# Altium PCB DSP6748_F.PcbDoc (part 6 of 16)
Units mil, origin at the board's own origin, x right, y up, seen from the top; angles counter-clockwise.
Board outline 8188.98 x 4055.12 mil, 4 copper layers (Top Layer, GND, VCC, Bottom Layer); 409 components, 262 nets, 1424 pads, 350 vias.
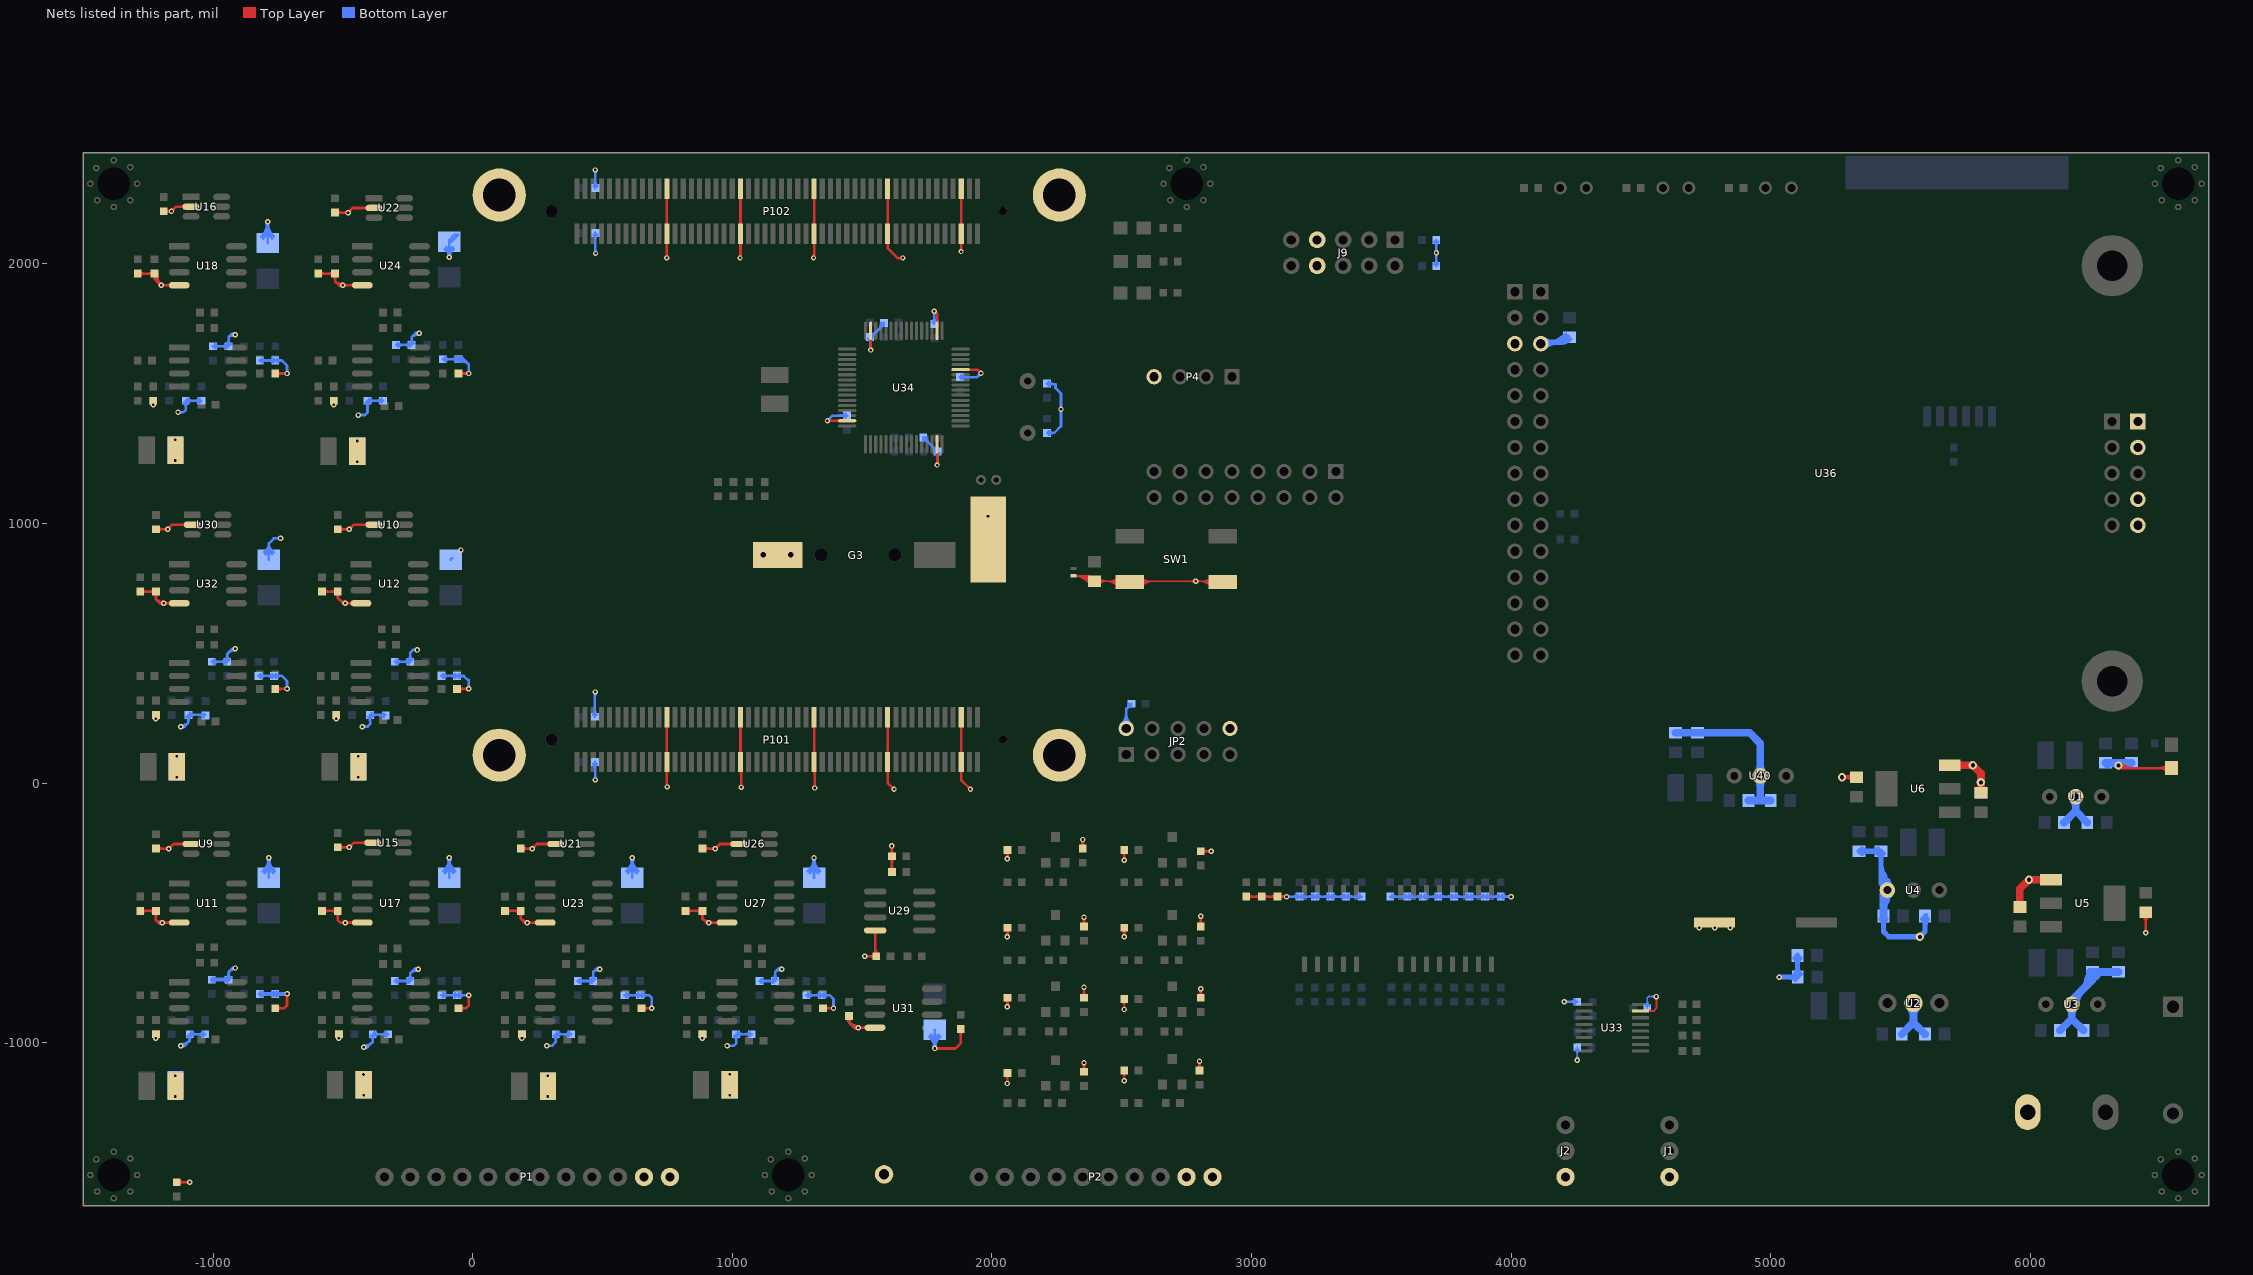
[diagram p8: the nets of this part, all layers, seen from the top]

## Via types
v1: diameter 21, hole 10, Top Layer to Bottom Layer, 244 vias
v2: diameter 20, hole 10, Top Layer to Bottom Layer, 84 vias
v3: diameter 32, hole 16, Top Layer to Bottom Layer, 11 vias
v4: diameter 24, hole 12, Top Layer to Bottom Layer, 7 vias
v5: diameter 39.37, hole 19.68, Top Layer to Bottom Layer, 3 vias
v6: diameter 30, hole 15, Top Layer to Bottom Layer, 1 vias

## Nets (pads, with @x,y where several pads share a name; then routed paths per layer and width w, separated by ;. In a path a pad name is that pad's centre, name@x,y a point inside that pad or via, vN(x,y) a via of type N, cw(c..) or ccw(c..) an arc to the next point about the centre after c; other vN are vias at no path point) (continued)
GND: (continued)
  Bottom Layer w10: v1(-1135.19,1427.52) -1115.19,1427.52 -1105.19,1437.52 C72.1@-1105.19,1472.52 C73.1@-1045.19,1472.52 ; v1@-1131.3,1423.63 cw(c-1121.91,1414.24) -1121.91,1427.52 cw(c-1121.91,1440.8) v1@-1131.3,1431.41 ; v1@-1125.87,213.07 ccw(c-1122.93,232.32) -1109.16,218.55 ; v1@-1125.19,-1016.98 ccw(c-1125.19,-991.63) -1107.27,-1009.56 ; v1(-1125.19,-1012.48) -1110.19,-1012.48 -1090.19,-992.48 ; v1@-1125.19,-1006.98 ccw(c-1125.19,-957.49) -1090.19,-992.48 ; v1(-1125.19,217.52) -1110.19,217.52 -1095.19,232.52 ; v1@-1124.36,222.96 ccw(c-1119.22,256.55) -1095.19,232.52 ; v1@-1121.3,-1016.37 cw(c-1111.91,-1025.76) -1111.91,-1012.48 cw(c-1111.91,-999.2) v1@-1121.3,-1008.59 ; v1@-1121.3,213.63 cw(c-1111.91,204.24) -1111.91,217.52 cw(c-1111.91,230.8) v1@-1121.3,221.41 ; C142.1@-1031.19,262.52 C141.1@-1095.19,262.52 -1095.19,232.52 ; C32.1@-1030.19,-967.48 C33.1@-1090.19,-967.48 -1090.19,-992.48 ; C144.1@-1005.19,467.52 C143.1@-945.19,467.52 -945.19,497.52 -925.19,517.52 v1(-915.19,517.52) ; C74.1@-1000.19,1682.52 C75.1@-940.19,1682.52 -940.19,1717.52 ; -941.65,501.06 cw(c-915.19,474.6) v1@-915.19,512.02 ; C35.1@-940.19,-757.48 -940.19,-727.48 ; -929.33,1728.38 cw(c-918.89,1717.95) v1@-913.57,1731.72 ; v1@-919.08,1723.63 ccw(c-928.47,1714.24) -928.47,1727.52 ccw(c-928.47,1740.8) v1@-919.08,1731.41 ; v1@-917.17,1722.39 ccw(c-924.94,1702.27) -940.19,1717.52 ; v1@-915.47,-717.97 ccw(c-917.14,-750.53) -940.19,-727.48 ; v1(-915.19,-712.48) -925.19,-712.48 -940.19,-727.48 ; v1(-915.19,1727.52) -930.19,1727.52 -940.19,1717.52 ; C146.1@-825.19,412.52 C145.1@-765.19,412.52 -735.19,412.52 -715.19,392.52 v1(-715.19,362.52) ; C77.1@-820.19,1627.52 C76.1@-760.19,1627.52 -735.19,1627.52 -715.19,1607.52 v1(-715.19,1577.52) ; C85.2@-790.19,2080.31 v1(-790.19,2162.52) ; C52.2@-785.19,-364.69 v1(-785.19,-287.48) ; C156.2@-785.19,860.31 -785.19,922.52 ; v1@-744.08,938.63 ccw(c-753.47,929.24) -753.47,942.52 ccw(c-753.47,955.8) v1@-744.08,946.41 ; v1(-740.19,942.52) -765.19,942.52 -785.19,922.52 ; v1@-719.08,366.41 ccw(c-728.47,375.8) -715.19,375.8 ccw(c-701.91,375.8) v1@-711.3,366.41 ; v1@-719.08,1581.41 ccw(c-728.47,1590.8) -715.19,1590.8 ccw(c-701.91,1590.8) v1@-711.3,1581.41 ; v1(-440.19,1417.52) -415.19,1417.52 -405.19,1427.52 C103.1@-405.19,1472.52 C104.2@-345.19,1472.52 ; v1@-436.3,1413.63 cw(c-426.91,1404.24) -426.91,1417.52 cw(c-426.91,1430.8) v1@-436.3,1421.41 ; v1(-425.19,217.52) -405.19,217.52 -395.19,227.52 C40.1@-395.19,262.52 C41.1@-337.19,262.52 ; v1@-421.3,213.63 cw(c-411.91,204.24) -411.91,217.52 cw(c-411.91,230.8) v1@-421.3,221.41 ; v1@-420.19,-1021.98 ccw(c-420.19,-996.63) -402.27,-1014.56 ; v1(-420.19,-1017.48) -405.19,-1017.48 -385.19,-997.48 ; v1@-420.19,-1011.98 ccw(c-420.19,-962.49) -385.19,-997.48 ; v1@-416.3,-1021.37 cw(c-406.91,-1030.76) -406.91,-1017.48 cw(c-406.91,-1004.2) v1@-416.3,-1013.59 ; C65.1@-325.19,-967.48 C64.1@-385.19,-967.48 -385.19,-997.48 ; C67.1@-300.19,-762.48 C66.1@-240.19,-762.48 -240.19,-732.48 ; C42.1@-300.19,467.52 C43.1@-240.19,467.52 -240.19,502.52 -230.19,512.52 v1(-214.16,512.52) ; C105.1@-295.19,1687.52 C106.1@-235.19,1687.52 -235.19,1717.52 ; -226.22,-718.51 cw(c-212.45,-732.28) v1@-209.51,-713.03 ; -221.22,1731.49 cw(c-207.45,1717.72) v1@-204.51,1736.97 ; v1@-218.05,508.63 ccw(c-227.44,499.24) -227.44,512.52 ccw(c-227.44,525.8) v1@-218.05,516.41 ; v1@-214.08,-721.37 ccw(c-223.47,-730.76) -223.47,-717.48 ccw(c-223.47,-704.2) v1@-214.08,-713.59 ; v1@-211.02,-722.92 ccw(c-216.16,-756.51) -240.19,-732.48 ; v1(-210.19,-717.48) -225.19,-717.48 -240.19,-732.48 ; v1@-209.08,1728.63 ccw(c-218.47,1719.24) -218.47,1732.52 ccw(c-218.47,1745.8) v1@-209.08,1736.41 ; v1@-206.02,1727.08 ccw(c-211.16,1693.49) -235.19,1717.52 ; v1(-205.19,1732.52) -220.19,1732.52 -235.19,1717.52 ; C68.1@-120.19,-817.48 C69.1@-60.19,-817.48 v1(-15.19,-817.48) ; C44.1@-120.19,412.52 C45.1@-60.19,412.52 -35.19,412.52 -15.19,392.52 ; C108.1@-115.19,1632.52 C107.1@-55.19,1632.52 ; C117.2@-107.57,2055.66 cw(c-125.54,2025) v1(-90,2025) ; C117.2@-102.51,2064.29 cw(c-115.31,2042.45) -90,2042.45 ; v1@-94.76,2027.75 ccw(c-106.26,2034.39) -93.44,2037.83 ccw(c-80.61,2041.26) v1@-87.25,2029.76 ; v1@-93.89,2028.89 ccw(c-103.28,2038.28) -90,2038.28 ccw(c-76.72,2038.28) v1@-86.11,2028.89 ; v1@-92.75,2029.76 ccw(c-99.39,2041.26) -86.56,2037.82 ccw(c-73.74,2034.39) v1@-85.24,2027.75 ; C84.2@-90.19,-364.69 v1(-90.19,-287.48) ; -90,2042.65 cw(c-64.64,2042.65) C117.2@-77.67,2064.41 ; C117.2@-90,2085.12 v1(-90,2025) ; C53.2@-85.19,860.31 -79.28,866.23 C53.2@-78.9,866.23 ; C117.2@-72.53,2055.83 ccw(c-54.07,2025) v1(-90,2025) ; C107.1@-57.66,1642.21 cw(c-53.1,1624.31) -40.04,1637.37 ; C107.1@-52.72,1622.83 cw(c-43.01,1584.7) -15.19,1612.52 ; -27.62,1624.95 ccw(c-48.06,1604.51) C107.1@-55.19,1632.52 ; v1@-19.08,366.41 ccw(c-28.47,375.8) -15.19,375.8 ccw(c-1.91,375.8) v1@-11.3,366.41 ; v1@-19.08,1581.41 ccw(c-28.47,1590.8) -15.19,1590.8 ccw(c-1.91,1590.8) v1@-11.3,1581.41 ; v1(-15.19,362.52) -15.19,397.52 ; v1(-15.19,1577.52) -15.19,1612.52 ; v1(284.81,-1012.48) 304.81,-1012.48 319.81,-997.48 C96.1@319.81,-967.48 C95.1@379.81,-967.48 ; v1@288.7,-1016.37 cw(c298.09,-1025.76) 298.09,-1012.48 cw(c298.09,-999.2) v1@288.7,-1008.59 ; C97.1@404.81,-762.48 C98.1@464.81,-762.48 464.81,-727.48 ; C190.1@463.79,262.59 ccw(c446.72,279.66) 470.86,279.66 ccw(c495.01,279.66) C190.1@477.94,262.59 ; C191.1@464.5,73.84 cw(c447.43,56.77) 471.57,56.77 cw(c495.71,56.77) C191.1@478.64,73.84 ; C192.1@465.71,2111.71 cw(c448.64,2094.64) 472.78,2094.64 cw(c496.92,2094.64) C192.1@479.85,2111.71 ; C193.1@465.71,2299.07 ccw(c448.64,2316.14) 472.78,2316.14 ccw(c496.92,2316.14) C193.1@479.85,2299.07 ; v2@468.75,15.54 ccw(c461.96,22.33) 471.57,22.33 ; v2@468.75,2358.46 cw(c459.04,2348.75) 472.78,2348.75 ; v2@469.75,2043.54 ccw(c462.45,2050.84) 472.78,2050.84 ; C190.1@470.86,255.52 470.86,349.57 v2(472.29,351) ; 470.86,335.49 cw(c487.8,335.49) v2@475.83,347.46 ; 471.57,25.81 ccw(c486.1,25.81) v2@475.83,15.54 ; C191.1@471.57,80.91 471.57,12.72 v2(472.29,12) ; v2(472.29,2362) 472.78,2361.51 C193.1@472.78,2292 ; 472.78,2053.3 ccw(c486.59,2053.3) v2@476.83,2043.54 ; C192.1@472.78,2118.78 472.78,2040.51 v2(473.29,2040) ; 472.78,2351.11 cw(c483.18,2351.11) v2@475.83,2358.46 ; 475.67,-716.62 cw(c486.11,-727.05) v1@491.43,-713.28 ; v1@485.92,-721.37 ccw(c476.53,-730.76) 476.53,-717.48 ccw(c476.53,-704.2) v1@485.92,-713.59 ; v1@487.83,-722.61 ccw(c480.06,-742.73) 464.81,-727.48 ; v1(489.81,-717.48) 474.81,-717.48 464.81,-727.48 ; C99.1@584.81,-817.48 C100.1@644.81,-817.48 679.81,-817.48 689.81,-827.48 v1(689.81,-867.48) ; C116.2@614.81,-364.69 v1(614.81,-287.48) ; v1(979.81,-1012.48) 1004.81,-1012.48 1014.81,-1002.48 C124.1@1014.81,-967.48 C125.1@1074.81,-967.48 ; v1@983.7,-1016.37 cw(c993.09,-1025.76) 993.09,-1012.48 cw(c993.09,-999.2) v1@983.7,-1008.59 ; C126.1@1104.81,-762.48 C127.1@1164.81,-762.48 1164.81,-727.48 ; 1175.67,-716.62 cw(c1186.11,-727.05) v1@1191.43,-713.28 ; v1@1185.92,-721.37 ccw(c1176.53,-730.76) 1176.53,-717.48 ccw(c1176.53,-704.2) v1@1185.92,-713.59 ; v1@1187.83,-722.61 ccw(c1180.06,-742.73) 1164.81,-727.48 ; v1(1189.81,-717.48) 1174.81,-717.48 1164.81,-727.48 ; C129.1@1284.81,-817.48 C128.1@1344.81,-817.48 1374.81,-817.48 1389.81,-832.48 v1(1389.81,-867.48) ; C133.2@1314.81,-364.69 v1(1314.81,-287.48) ; v2(1366.2,1395.57) 1385.88,1415.25 C189.1@1442.31,1415.25 ; v2@1366.2,1400.57 ccw(c1366.2,1412.64) 1374.73,1404.1 ccw(c1383.27,1395.57) v2@1371.2,1395.57 ; v1@1385.92,-863.59 ccw(c1376.53,-854.2) 1389.81,-854.2 ccw(c1403.09,-854.2) v1@1393.7,-863.59 ; C189.1@1435.23,1408.18 ccw(c1418.16,1391.11) 1418.16,1415.25 ccw(c1418.16,1439.39) C189.1@1435.23,1422.32 ; C148.1@1449.81,-897.48 1449.81,-922.48 ; 1466.89,-939.56 ccw(c1484.81,-921.63) v1@1484.81,-946.98 ; v1@1480.92,-946.37 ccw(c1471.53,-955.76) 1471.53,-942.48 ccw(c1471.53,-929.2) v1@1480.92,-938.59 ; v1(1484.81,-942.48) 1469.81,-942.48 1449.81,-922.48 ; v1@1484.81,-936.98 cw(c1484.81,-887.49) 1449.81,-922.48 ; C188.1@1523.74,1711.45 cw(c1501.02,1688.73) 1533.15,1688.73 ; v2@1529.61,1671.06 ccw(c1521.08,1679.59) 1533.15,1679.59 ccw(c1545.22,1679.59) v2@1536.69,1671.06 ; C188.1@1530.81,1728.52 ccw(c1530.81,1763.96) 1555.87,1738.9 ; v2(1533.15,1667.52) 1533.15,1716.18 1583.91,1766.94 R163.2@1583.91,1772.3 ; 1533.15,1700.03 cw(c1549.3,1700.03) C188.1@1537.88,1711.45 ; C188.1@1540.81,1718.52 cw(c1553.65,1718.52) C188.1@1544.57,1727.6 ; 1563.05,1746.08 ccw(c1536.83,1772.3) R163.2@1573.91,1772.3 ; R163.2@1575.99,1759.02 cw(c1583.91,1751.09) R163.2@1583.91,1762.3 ; R164.2@1735.81,1321.52 cw(c1735.81,1297.38) 1752.88,1314.45 cw(c1769.95,1331.52) R164.2@1745.81,1331.52 ; R164.2@1735.81,1331.52 C186.1@1790.81,1276.52 1789.15,1274.86 v2(1789.15,1224.52) ; C187.1@1771.74,1775.59 ccw(c1756.26,1791.07) 1778.15,1791.07 ; v2@1774.61,1813.98 cw(c1766.08,1805.45) 1778.15,1805.45 cw(c1790.22,1805.45) v2@1781.69,1813.98 ; 1778.15,1794.26 ccw(c1804.55,1794.26) C187.1@1785.88,1775.59 ; v2(1778.15,1817.52) 1778.15,1769.18 C187.1@1778.81,1768.52 ; C149.2@1779.81,-950.28 v1(1779.81,-1022.48) ; C186.1@1780.81,1276.52 ccw(c1756.67,1276.52) 1773.74,1293.59 ccw(c1790.81,1310.66) C186.1@1790.81,1286.52 ; C186.1@1783.74,1269.45 cw(c1770.68,1256.39) 1789.15,1256.39 ; v2@1785.61,1228.06 ccw(c1777.08,1236.59) 1789.15,1236.59 ccw(c1801.22,1236.59) v2@1792.69,1228.06 ; 1789.15,1248.37 cw(c1818.96,1248.37) C186.1@1797.88,1269.45 ; C183.1@1875.81,1563.52 1943.15,1563.52 v2(1958.15,1578.52) ; C183.1@1882.88,1556.45 cw(c1899.95,1539.38) 1899.95,1563.52 cw(c1899.95,1587.66) C183.1@1882.88,1570.59 ; C184.1@1952.81,1026.52 C185.1@2017.81,1026.52 ; v2@1953.15,1578.52 cw(c1941.08,1578.52) 1949.61,1569.98 cw(c1958.15,1561.45) v2@1958.15,1573.52 ; C184.1@1959.88,1019.45 cw(c1976.95,1002.38) 1976.95,1026.52 cw(c1976.95,1050.66) C184.1@1959.88,1033.59 ; 1970.05,1028.37 ccw(c1973.31,1040.54) v2@1981.79,1031.22 ; 1970.5,1024.79 cw(c1974.64,1009.32) v2@1982.65,1023.19 ; 1970.66,1026.52 ccw(c1970.66,1042) v2@1981.61,1031.06 ; v2@1987.65,1023.19 cw(c1995.8,1009.07) 2000.02,1024.82 ; v2@1988.51,1031.22 ccw(c1997.12,1040.7) 2000.43,1028.33 ; v2@1988.69,1031.06 ccw(c1999.63,1042) 1999.63,1026.52 ; C185.1@2010.74,1019.45 ccw(c1993.67,1002.38) 1993.67,1026.52 ccw(c1993.67,1050.66) C185.1@2010.74,1033.59 ; C182.2@2211.82,1538.46 2214.76,1535.52 2245,1535.52 2245,1521.15 2266.15,1500 v2(2266.15,1440) 2266.15,1374.52 2240.2,1348.57 C181.2@2212.81,1348.57 ; C182.2@2218.89,1531.39 cw(c2228.85,1521.43) 2228.85,1535.52 ; C182.2@2218.89,1545.54 ccw(c2243.07,1569.72) 2243.07,1535.52 ; C181.2@2219.88,1341.5 cw(c2236.95,1324.43) 2236.95,1348.57 cw(c2236.95,1372.72) C181.2@2219.88,1355.65 ; v2@2262.61,1436.46 cw(c2254.08,1427.93) 2266.15,1427.93 cw(c2278.22,1427.93) v2@2269.69,1436.46 ; v2@2262.61,1443.54 ccw(c2254.08,1452.07) 2266.15,1452.07 ccw(c2278.22,1452.07) v2@2269.69,1443.54 ; JP2.2@2499.95,227.34 ccw(c2458.08,269.21) 2517.29,269.21 ccw(c2576.5,269.21) JP2.2@2534.63,227.34 ; JP2.2@2507.02,220.27 ccw(c2482.22,245.07) 2517.29,245.07 ccw(c2552.36,245.07) JP2.2@2527.56,220.27 ; JP2.2@2517.29,210 2517.29,285 C180.2@2537.29,305 ; C180.2@2527.29,305 cw(c2503.15,305) 2520.22,287.93 cw(c2537.29,270.86) C180.2@2537.29,295 ; v1(3134.81,-437.48) R124.1@3184.81,-437.48 R125.1@3244.81,-437.48 R126.1@3304.81,-437.48 R127.1@3364.81,-437.48 R128.1@3424.81,-437.48 ; R151.1@3534.81,-437.48 R150.1@3599.81,-437.48 R149.1@3659.81,-437.48 R148.1@3719.81,-437.48 R147.1@3779.81,-437.48 R146.1@3839.81,-437.48 R145.1@3899.81,-437.48 R144.1@3959.81,-437.48 v1(3999.81,-437.48) ; C158.1@3705.08,1998.59 ccw(c3688.01,2015.66) 3712.15,2015.66 ccw(c3736.29,2015.66) C158.1@3719.22,1998.59 ; C157.1@3705.08,2084.45 cw(c3688.01,2067.38) 3712.15,2067.38 cw(c3736.29,2067.38) C157.1@3719.22,2084.45 ; v2@3708.61,2038.98 cw(c3700.08,2030.45) 3712.15,2030.45 cw(c3724.22,2030.45) v2@3715.69,2038.98 ; v2@3708.61,2046.06 ccw(c3700.08,2054.59) 3712.15,2054.59 ccw(c3724.22,2054.59) v2@3715.69,2046.06 ; C158.1@3712.15,1991.52 v2(3712.15,2042.52) C157.1@3712.15,2091.52 ; U36.J2-3@4114.81,1692.52 4199.81,1692.52 ; v1(4204.81,-842.48) C162.2@4254.81,-842.48 ; C170.2@4205.38,1713.08 cw(c4184.67,1707.66) 4199.81,1692.52 ; C170.2@4220.72,1700.09 ccw(c4218.35,1673.98) 4199.81,1692.52 ; C170.2@4224.81,1717.52 4199.81,1692.52 ; C72.1@-1112.26,1465.45 cw(c-1129.33,1448.38) -1105.19,1448.38 ; C72.1@-1112.26,1465.45 cw(c-1129.33,1448.38) -1105.19,1448.38 ; C72.1@-1112.26,1465.45 cw(c-1129.33,1448.38) -1105.19,1448.38 ; -1105.19,1448.38 cw(c-1081.05,1448.38) C72.1@-1098.12,1465.45 ; -1105.19,1448.38 cw(c-1081.05,1448.38) C72.1@-1098.12,1465.45 ; -1105.19,1448.38 cw(c-1081.05,1448.38) C72.1@-1098.12,1465.45 ; C141.1@-1102.26,255.45 cw(c-1119.33,238.38) -1095.19,238.38 ; C141.1@-1102.26,255.45 cw(c-1119.33,238.38) -1095.19,238.38 ; C141.1@-1102.26,255.45 cw(c-1119.33,238.38) -1095.19,238.38 ; C72.1@-1098.12,1465.45 cw(c-1081.05,1448.38) -1081.05,1472.52 ; C72.1@-1098.12,1465.45 cw(c-1081.05,1448.38) -1081.05,1472.52 ; C72.1@-1098.12,1465.45 cw(c-1081.05,1448.38) -1081.05,1472.52 ; C72.1@-1098.12,1479.59 ccw(c-1081.05,1496.66) -1081.05,1472.52 ; C72.1@-1098.12,1479.59 ccw(c-1081.05,1496.66) -1081.05,1472.52 ; C72.1@-1098.12,1479.59 ccw(c-1081.05,1496.66) -1081.05,1472.52 ; C33.1@-1097.26,-974.55 cw(c-1114.33,-991.62) -1090.19,-991.62 ; C33.1@-1097.26,-974.55 cw(c-1114.33,-991.62) -1090.19,-991.62 ; C33.1@-1097.26,-974.55 cw(c-1114.33,-991.62) -1090.19,-991.62 ; -1095.19,238.38 cw(c-1071.05,238.38) C141.1@-1088.12,255.45 ; -1095.19,238.38 cw(c-1071.05,238.38) C141.1@-1088.12,255.45 ; -1095.19,238.38 cw(c-1071.05,238.38) C141.1@-1088.12,255.45 ; -1090.19,-991.62 cw(c-1066.05,-991.62) C33.1@-1083.12,-974.55 ; -1090.19,-991.62 cw(c-1066.05,-991.62) C33.1@-1083.12,-974.55 ; -1090.19,-991.62 cw(c-1066.05,-991.62) C33.1@-1083.12,-974.55 ; C141.1@-1088.12,255.45 cw(c-1071.05,238.38) -1071.05,262.52 ; C141.1@-1088.12,255.45 cw(c-1071.05,238.38) -1071.05,262.52 ; C141.1@-1088.12,255.45 cw(c-1071.05,238.38) -1071.05,262.52 ; C141.1@-1088.12,269.59 ccw(c-1071.05,286.66) -1071.05,262.52 ; C141.1@-1088.12,269.59 ccw(c-1071.05,286.66) -1071.05,262.52 ; C141.1@-1088.12,269.59 ccw(c-1071.05,286.66) -1071.05,262.52 ; C33.1@-1083.12,-974.55 cw(c-1066.05,-991.62) -1066.05,-967.48 ; C33.1@-1083.12,-974.55 cw(c-1066.05,-991.62) -1066.05,-967.48 ; C33.1@-1083.12,-974.55 cw(c-1066.05,-991.62) -1066.05,-967.48 ; C33.1@-1083.12,-960.41 ccw(c-1066.05,-943.34) -1066.05,-967.48 ; C33.1@-1083.12,-960.41 ccw(c-1066.05,-943.34) -1066.05,-967.48 ; C33.1@-1083.12,-960.41 ccw(c-1066.05,-943.34) -1066.05,-967.48 ; -1069.33,1472.52 cw(c-1069.33,1448.38) C73.1@-1052.26,1465.45 ; -1069.33,1472.52 ccw(c-1069.33,1496.66) C73.1@-1052.26,1479.59 ; -1069.33,1472.52 cw(c-1069.33,1448.38) C73.1@-1052.26,1465.45 ; -1069.33,1472.52 ccw(c-1069.33,1496.66) C73.1@-1052.26,1479.59 ; -1069.33,1472.52 ccw(c-1069.33,1496.66) C73.1@-1052.26,1479.59 ; -1069.33,1472.52 cw(c-1069.33,1448.38) C73.1@-1052.26,1465.45 ; -1058.16,262.52 cw(c-1058.16,231.55) C142.1@-1036.26,253.45 ; -1058.16,262.52 cw(c-1058.16,231.55) C142.1@-1036.26,253.45 ; -1058.16,262.52 cw(c-1058.16,231.55) C142.1@-1036.26,253.45 ; -1054.33,-967.48 cw(c-1054.33,-991.62) C32.1@-1037.26,-974.55 ; -1054.33,-967.48 ccw(c-1054.33,-943.34) C32.1@-1037.26,-960.41 ; -1054.33,-967.48 cw(c-1054.33,-991.62) C32.1@-1037.26,-974.55 ; -1054.33,-967.48 ccw(c-1054.33,-943.34) C32.1@-1037.26,-960.41 ; -1054.33,-967.48 ccw(c-1054.33,-943.34) C32.1@-1037.26,-960.41 ; -1054.33,-967.48 cw(c-1054.33,-991.62) C32.1@-1037.26,-974.55 ; -1048.5,262.52 ccw(c-1048.5,279.83) C142.1@-1036.26,267.59 ; -1048.5,262.52 ccw(c-1048.5,279.83) C142.1@-1036.26,267.59 ; -1048.5,262.52 ccw(c-1048.5,279.83) C142.1@-1036.26,267.59 ; C144.1@-998.12,460.45 cw(c-981.05,443.38) -981.05,467.52 ; C144.1@-998.12,460.45 cw(c-981.05,443.38) -981.05,467.52 ; C144.1@-998.12,460.45 cw(c-981.05,443.38) -981.05,467.52 ; C144.1@-998.12,474.59 ccw(c-981.05,491.66) -981.05,467.52 ; C144.1@-998.12,474.59 ccw(c-981.05,491.66) -981.05,467.52 ; C144.1@-998.12,474.59 ccw(c-981.05,491.66) -981.05,467.52 ; C74.1@-993.12,1675.45 cw(c-976.05,1658.38) -976.05,1682.52 ; C74.1@-993.12,1675.45 cw(c-976.05,1658.38) -976.05,1682.52 ; C74.1@-993.12,1675.45 cw(c-976.05,1658.38) -976.05,1682.52 ; C74.1@-993.12,1689.59 ccw(c-976.05,1706.66) -976.05,1682.52 ; C74.1@-993.12,1689.59 ccw(c-976.05,1706.66) -976.05,1682.52 ; C74.1@-993.12,1689.59 ccw(c-976.05,1706.66) -976.05,1682.52 ; -969.33,467.52 cw(c-969.33,443.38) C143.1@-952.26,460.45 ; -969.33,467.52 ccw(c-969.33,491.66) C143.1@-952.26,474.59 ; -969.33,467.52 cw(c-969.33,443.38) C143.1@-952.26,460.45 ; -969.33,467.52 ccw(c-969.33,491.66) C143.1@-952.26,474.59 ; -969.33,467.52 ccw(c-969.33,491.66) C143.1@-952.26,474.59 ; -969.33,467.52 cw(c-969.33,443.38) C143.1@-952.26,460.45 ; -964.33,1682.52 cw(c-964.33,1658.38) C75.1@-947.26,1675.45 ; -964.33,1682.52 ccw(c-964.33,1706.66) C75.1@-947.26,1689.59 ; -964.33,1682.52 cw(c-964.33,1658.38) C75.1@-947.26,1675.45 ; -964.33,1682.52 ccw(c-964.33,1706.66) C75.1@-947.26,1689.59 ; -964.33,1682.52 ccw(c-964.33,1706.66) C75.1@-947.26,1689.59 ; -964.33,1682.52 cw(c-964.33,1658.38) C75.1@-947.26,1675.45 ; C143.1@-952.26,474.59 ccw(c-969.33,491.66) -945.19,491.66 ; C143.1@-952.26,474.59 ccw(c-969.33,491.66) -945.19,491.66 ; C143.1@-952.26,474.59 ccw(c-969.33,491.66) -945.19,491.66 ; C35.1@-947.26,-750.41 ccw(c-964.33,-733.34) -940.19,-733.34 ; C35.1@-947.26,-750.41 ccw(c-964.33,-733.34) -940.19,-733.34 ; C35.1@-947.26,-750.41 ccw(c-964.33,-733.34) -940.19,-733.34 ; C75.1@-947.26,1689.59 ccw(c-964.33,1706.66) -940.19,1706.66 ; C75.1@-947.26,1689.59 ccw(c-964.33,1706.66) -940.19,1706.66 ; C75.1@-947.26,1689.59 ccw(c-964.33,1706.66) -940.19,1706.66 ; -945.19,491.66 ccw(c-921.05,491.66) C143.1@-938.12,474.59 ; -945.19,491.66 ccw(c-921.05,491.66) C143.1@-938.12,474.59 ; -945.19,491.66 ccw(c-921.05,491.66) C143.1@-938.12,474.59 ; -940.19,-733.34 ccw(c-916.05,-733.34) C35.1@-933.12,-750.41 ; -940.19,-733.34 ccw(c-916.05,-733.34) C35.1@-933.12,-750.41 ; -940.19,-733.34 ccw(c-916.05,-733.34) C35.1@-933.12,-750.41 ; -940.19,1706.66 ccw(c-916.05,1706.66) C75.1@-933.12,1689.59 ; -940.19,1706.66 ccw(c-916.05,1706.66) C75.1@-933.12,1689.59 ; -940.19,1706.66 ccw(c-916.05,1706.66) C75.1@-933.12,1689.59 ; C146.1@-818.12,405.45 cw(c-801.05,388.38) -801.05,412.52 ; C146.1@-818.12,405.45 cw(c-801.05,388.38) -801.05,412.52 ; C146.1@-818.12,405.45 cw(c-801.05,388.38) -801.05,412.52 ; C146.1@-818.12,419.59 ccw(c-801.05,436.66) -801.05,412.52 ; C146.1@-818.12,419.59 ccw(c-801.05,436.66) -801.05,412.52 ; C146.1@-818.12,419.59 ccw(c-801.05,436.66) -801.05,412.52 ; C85.2@-814.33,2104.78 ccw(c-871.3,2162.52) v1(-790.19,2162.52) ; C85.2@-814.33,2104.78 ccw(c-871.3,2162.52) v1(-790.19,2162.52) ; C85.2@-814.33,2104.78 ccw(c-871.3,2162.52) v1(-790.19,2162.52) ; C77.1@-813.12,1620.45 cw(c-796.05,1603.38) -796.05,1627.52 ; C77.1@-813.12,1620.45 cw(c-796.05,1603.38) -796.05,1627.52 ; C77.1@-813.12,1620.45 cw(c-796.05,1603.38) -796.05,1627.52 ; C77.1@-813.12,1634.59 ccw(c-796.05,1651.66) -796.05,1627.52 ; C77.1@-813.12,1634.59 ccw(c-796.05,1651.66) -796.05,1627.52 ; C77.1@-813.12,1634.59 ccw(c-796.05,1651.66) -796.05,1627.52 ; C52.2@-808.19,-339.14 ccw(c-854.71,-287.48) v1(-785.19,-287.48) ; C52.2@-808.19,-339.14 ccw(c-854.71,-287.48) v1(-785.19,-287.48) ; C52.2@-808.19,-339.14 ccw(c-854.71,-287.48) v1(-785.19,-287.48) ; C85.2@-807.31,2097.66 ccw(c-847.7,2138.6) -790.19,2138.6 ; C85.2@-807.31,2097.66 ccw(c-847.7,2138.6) -790.19,2138.6 ; C85.2@-807.31,2097.66 ccw(c-847.7,2138.6) -790.19,2138.6 ; C156.2@-803.48,889.41 ccw(c-824.29,922.52) -785.19,922.52 ; C156.2@-803.48,889.41 ccw(c-824.29,922.52) -785.19,922.52 ; C156.2@-803.48,889.41 ccw(c-824.29,922.52) -785.19,922.52 ; C52.2@-801.5,-346.58 ccw(c-834.48,-309.95) -785.19,-309.95 ; C52.2@-801.5,-346.58 ccw(c-834.48,-309.95) -785.19,-309.95 ; C52.2@-801.5,-346.58 ccw(c-834.48,-309.95) -785.19,-309.95 ; C156.2@-798.16,880.95 ccw(c-812.91,904.42) -785.19,904.42 ; C156.2@-798.16,880.95 ccw(c-812.91,904.42) -785.19,904.42 ; C156.2@-798.16,880.95 ccw(c-812.91,904.42) -785.19,904.42 ; v1@-794.93,2159.73 cw(c-806.37,2152.98) -793.51,2149.66 ; v1@-794.93,2159.73 cw(c-806.37,2152.98) -793.51,2149.66 ; v1@-794.93,2159.73 cw(c-806.37,2152.98) -793.51,2149.66 ; v1@-794.08,2158.63 cw(c-803.47,2149.24) -790.19,2149.24 ; v1@-794.08,2158.63 cw(c-803.47,2149.24) -790.19,2149.24 ; v1@-794.08,2158.63 cw(c-803.47,2149.24) -790.19,2149.24 ; -793.5,2149.66 cw(c-780.65,2146.35) v1@-787.4,2157.78 ; -793.5,2149.66 cw(c-780.65,2146.35) v1@-787.4,2157.78 ; -793.5,2149.66 cw(c-780.65,2146.35) v1@-787.4,2157.78 ; v1@-792.98,2157.78 cw(c-799.73,2146.35) -786.88,2149.66 ; v1@-792.98,2157.78 cw(c-799.73,2146.35) -786.88,2149.66 ; v1@-792.98,2157.78 cw(c-799.73,2146.35) -786.88,2149.66 ; -790.19,2138.6 ccw(c-732.68,2138.6) C85.2@-773.07,2097.66 ; -790.19,2138.6 ccw(c-732.68,2138.6) C85.2@-773.07,2097.66 ; -790.19,2138.6 ccw(c-732.68,2138.6) C85.2@-773.07,2097.66 ; -790.19,2149.24 cw(c-776.91,2149.24) v1@-786.3,2158.63 ; -790.19,2149.24 cw(c-776.91,2149.24) v1@-786.3,2158.63 ; -790.19,2149.24 cw(c-776.91,2149.24) v1@-786.3,2158.63 ; v1(-790.19,2162.52) ccw(c-709.08,2162.52) C85.2@-766.05,2104.78 ; v1(-790.19,2162.52) ccw(c-709.08,2162.52) C85.2@-766.05,2104.78 ; v1(-790.19,2162.52) ccw(c-709.08,2162.52) C85.2@-766.05,2104.78 ; v1@-789.95,-290.23 cw(c-801.46,-296.87) -788.63,-300.31 ; v1@-789.95,-290.23 cw(c-801.46,-296.87) -788.63,-300.31 ; v1@-789.95,-290.23 cw(c-801.46,-296.87) -788.63,-300.31 ; -789.33,412.52 cw(c-789.33,388.38) C145.1@-772.26,405.45 ; -789.33,412.52 ccw(c-789.33,436.66) C145.1@-772.26,419.59 ; -789.33,412.52 cw(c-789.33,388.38) C145.1@-772.26,405.45 ; -789.33,412.52 ccw(c-789.33,436.66) C145.1@-772.26,419.59 ; -789.33,412.52 ccw(c-789.33,436.66) C145.1@-772.26,419.59 ; -789.33,412.52 cw(c-789.33,388.38) C145.1@-772.26,405.45 ; v1@-789.08,-291.37 cw(c-798.47,-300.76) -785.19,-300.76 ; v1@-789.08,-291.37 cw(c-798.47,-300.76) -785.19,-300.76 ; v1@-789.08,-291.37 cw(c-798.47,-300.76) -785.19,-300.76 ; -788.63,-300.3 cw(c-775.8,-303.74) v1@-782.44,-292.24 ; -788.63,-300.3 cw(c-775.8,-303.74) v1@-782.44,-292.24 ; -788.63,-300.3 cw(c-775.8,-303.74) v1@-782.44,-292.24 ; v1@-787.94,-292.24 cw(c-794.58,-303.74) -781.76,-300.3 ; v1@-787.94,-292.24 cw(c-794.58,-303.74) -781.76,-300.3 ; v1@-787.94,-292.24 cw(c-794.58,-303.74) -781.76,-300.3 ; -786.87,2149.66 cw(c-774.01,2152.98) v1@-785.45,2159.73 ; -786.87,2149.66 cw(c-774.01,2152.98) v1@-785.45,2159.73 ; -786.87,2149.66 cw(c-774.01,2152.98) v1@-785.45,2159.73 ; -785.19,-309.95 ccw(c-735.9,-309.95) C52.2@-768.88,-346.58 ; -785.19,-309.95 ccw(c-735.9,-309.95) C52.2@-768.88,-346.58 ; -785.19,-309.95 ccw(c-735.9,-309.95) C52.2@-768.88,-346.58 ; -785.19,-300.76 cw(c-771.91,-300.76) v1@-781.3,-291.37 ; -785.19,-300.76 cw(c-771.91,-300.76) v1@-781.3,-291.37 ; -785.19,-300.76 cw(c-771.91,-300.76) v1@-781.3,-291.37 ; v1(-785.19,-287.48) ccw(c-715.67,-287.48) C52.2@-762.19,-339.14 ; v1(-785.19,-287.48) ccw(c-715.67,-287.48) C52.2@-762.19,-339.14 ; v1(-785.19,-287.48) ccw(c-715.67,-287.48) C52.2@-762.19,-339.14 ; -785.19,904.42 ccw(c-757.47,904.42) C156.2@-772.22,880.95 ; -785.19,904.42 ccw(c-757.47,904.42) C156.2@-772.22,880.95 ; -785.19,904.42 ccw(c-757.47,904.42) C156.2@-772.22,880.95 ; -785.19,922.52 ccw(c-746.09,922.52) C156.2@-766.9,889.41 ; -785.19,922.52 ccw(c-746.09,922.52) C156.2@-766.9,889.41 ; -785.19,922.52 ccw(c-746.09,922.52) C156.2@-766.9,889.41 ; -784.33,1627.52 cw(c-784.33,1603.38) C76.1@-767.26,1620.45 ; -784.33,1627.52 ccw(c-784.33,1651.66) C76.1@-767.26,1634.59 ; -784.33,1627.52 cw(c-784.33,1603.38) C76.1@-767.26,1620.45 ; -784.33,1627.52 ccw(c-784.33,1651.66) C76.1@-767.26,1634.59 ; -784.33,1627.52 ccw(c-784.33,1651.66) C76.1@-767.26,1634.59 ; -784.33,1627.52 cw(c-784.33,1603.38) C76.1@-767.26,1620.45 ; -781.75,-300.31 cw(c-768.93,-296.87) v1@-780.43,-290.23 ; -781.75,-300.31 cw(c-768.93,-296.87) v1@-780.43,-290.23 ; -781.75,-300.31 cw(c-768.93,-296.87) v1@-780.43,-290.23 ; C145.1@-758.12,405.45 cw(c-741.05,388.38) -741.05,412.52 ; C145.1@-758.12,405.45 cw(c-741.05,388.38) -741.05,412.52 ; C145.1@-758.12,405.45 cw(c-741.05,388.38) -741.05,412.52 ; C145.1@-758.12,419.59 ccw(c-741.05,436.66) -741.05,412.52 ; C145.1@-758.12,419.59 ccw(c-741.05,436.66) -741.05,412.52 ; C145.1@-758.12,419.59 ccw(c-741.05,436.66) -741.05,412.52 ; C76.1@-753.12,1620.45 cw(c-736.05,1603.38) -736.05,1627.52 ; C76.1@-753.12,1620.45 cw(c-736.05,1603.38) -736.05,1627.52 ; C76.1@-753.12,1620.45 cw(c-736.05,1603.38) -736.05,1627.52 ; C76.1@-753.12,1634.59 ccw(c-736.05,1651.66) -736.05,1627.52 ; C76.1@-753.12,1634.59 ccw(c-736.05,1651.66) -736.05,1627.52 ; C76.1@-753.12,1634.59 ccw(c-736.05,1651.66) -736.05,1627.52 ; C103.1@-412.26,1465.45 cw(c-429.33,1448.38) -405.19,1448.38 ; C103.1@-412.26,1465.45 cw(c-429.33,1448.38) -405.19,1448.38 ; C103.1@-412.26,1465.45 cw(c-429.33,1448.38) -405.19,1448.38 ; -405.19,1448.38 cw(c-381.05,1448.38) C103.1@-398.12,1465.45 ; -405.19,1448.38 cw(c-381.05,1448.38) C103.1@-398.12,1465.45 ; -405.19,1448.38 cw(c-381.05,1448.38) C103.1@-398.12,1465.45 ; C40.1@-402.26,255.45 cw(c-419.33,238.38) -395.19,238.38 ; C40.1@-402.26,255.45 cw(c-419.33,238.38) -395.19,238.38 ; C40.1@-402.26,255.45 cw(c-419.33,238.38) -395.19,238.38 ; C103.1@-398.12,1465.45 cw(c-381.05,1448.38) -381.05,1472.52 ; C103.1@-398.12,1465.45 cw(c-381.05,1448.38) -381.05,1472.52 ; C103.1@-398.12,1465.45 cw(c-381.05,1448.38) -381.05,1472.52 ; C103.1@-398.12,1479.59 ccw(c-381.05,1496.66) -381.05,1472.52 ; C103.1@-398.12,1479.59 ccw(c-381.05,1496.66) -381.05,1472.52 ; C103.1@-398.12,1479.59 ccw(c-381.05,1496.66) -381.05,1472.52 ; -395.19,238.38 cw(c-371.05,238.38) C40.1@-388.12,255.45 ; -395.19,238.38 cw(c-371.05,238.38) C40.1@-388.12,255.45 ; -395.19,238.38 cw(c-371.05,238.38) C40.1@-388.12,255.45 ; C64.1@-392.26,-974.55 cw(c-409.33,-991.62) -385.19,-991.62 ; C64.1@-392.26,-974.55 cw(c-409.33,-991.62) -385.19,-991.62 ; C64.1@-392.26,-974.55 cw(c-409.33,-991.62) -385.19,-991.62 ; C40.1@-388.12,255.45 cw(c-371.05,238.38) -371.05,262.52 ; C40.1@-388.12,255.45 cw(c-371.05,238.38) -371.05,262.52 ; C40.1@-388.12,255.45 cw(c-371.05,238.38) -371.05,262.52 ; C40.1@-388.12,269.59 ccw(c-371.05,286.66) -371.05,262.52 ; C40.1@-388.12,269.59 ccw(c-371.05,286.66) -371.05,262.52 ; C40.1@-388.12,269.59 ccw(c-371.05,286.66) -371.05,262.52 ; -385.19,-991.62 cw(c-361.05,-991.62) C64.1@-378.12,-974.55 ; -385.19,-991.62 cw(c-361.05,-991.62) C64.1@-378.12,-974.55 ; -385.19,-991.62 cw(c-361.05,-991.62) C64.1@-378.12,-974.55 ; C64.1@-378.12,-974.55 cw(c-361.05,-991.62) -361.05,-967.48 ; C64.1@-378.12,-974.55 cw(c-361.05,-991.62) -361.05,-967.48 ; C64.1@-378.12,-974.55 cw(c-361.05,-991.62) -361.05,-967.48 ; C64.1@-378.12,-960.41 ccw(c-361.05,-943.34) -361.05,-967.48 ; C64.1@-378.12,-960.41 ccw(c-361.05,-943.34) -361.05,-967.48 ; C64.1@-378.12,-960.41 ccw(c-361.05,-943.34) -361.05,-967.48 ; -369.33,1472.52 cw(c-369.33,1448.38) C104.2@-352.26,1465.45 ; -369.33,1472.52 ccw(c-369.33,1496.66) C104.2@-352.26,1479.59 ; -369.33,1472.52 cw(c-369.33,1448.38) C104.2@-352.26,1465.45 ; -369.33,1472.52 ccw(c-369.33,1496.66) C104.2@-352.26,1479.59 ; -369.33,1472.52 ccw(c-369.33,1496.66) C104.2@-352.26,1479.59 ; -369.33,1472.52 cw(c-369.33,1448.38) C104.2@-352.26,1465.45 ; -364.16,262.52 cw(c-364.16,231.55) C41.1@-342.26,253.45 ; -364.16,262.52 cw(c-364.16,231.55) C41.1@-342.26,253.45 ; -364.16,262.52 cw(c-364.16,231.55) C41.1@-342.26,253.45 ; -354.5,262.52 ccw(c-354.5,279.83) C41.1@-342.26,267.59 ; -354.5,262.52 ccw(c-354.5,279.83) C41.1@-342.26,267.59 ; -354.5,262.52 ccw(c-354.5,279.83) C41.1@-342.26,267.59 ; -349.33,-967.48 cw(c-349.33,-991.62) C65.1@-332.26,-974.55 ; -349.33,-967.48 ccw(c-349.33,-943.34) C65.1@-332.26,-960.41 ; -349.33,-967.48 cw(c-349.33,-991.62) C65.1@-332.26,-974.55 ; -349.33,-967.48 ccw(c-349.33,-943.34) C65.1@-332.26,-960.41 ; -349.33,-967.48 ccw(c-349.33,-943.34) C65.1@-332.26,-960.41 ; -349.33,-967.48 cw(c-349.33,-991.62) C65.1@-332.26,-974.55 ; C67.1@-293.12,-769.55 cw(c-276.05,-786.62) -276.05,-762.48 ; C67.1@-293.12,-769.55 cw(c-276.05,-786.62) -276.05,-762.48 ; C67.1@-293.12,-769.55 cw(c-276.05,-786.62) -276.05,-762.48 ; C67.1@-293.12,-755.41 ccw(c-276.05,-738.34) -276.05,-762.48 ; C67.1@-293.12,-755.41 ccw(c-276.05,-738.34) -276.05,-762.48 ; C67.1@-293.12,-755.41 ccw(c-276.05,-738.34) -276.05,-762.48 ; C42.1@-293.12,460.45 cw(c-276.05,443.38) -276.05,467.52 ; C42.1@-293.12,460.45 cw(c-276.05,443.38) -276.05,467.52 ; C42.1@-293.12,460.45 cw(c-276.05,443.38) -276.05,467.52 ; C42.1@-293.12,474.59 ccw(c-276.05,491.66) -276.05,467.52 ; C42.1@-293.12,474.59 ccw(c-276.05,491.66) -276.05,467.52 ; C42.1@-293.12,474.59 ccw(c-276.05,491.66) -276.05,467.52 ; C105.1@-288.12,1680.45 cw(c-271.05,1663.38) -271.05,1687.52 ; C105.1@-288.12,1680.45 cw(c-271.05,1663.38) -271.05,1687.52 ; C105.1@-288.12,1680.45 cw(c-271.05,1663.38) -271.05,1687.52 ; C105.1@-288.12,1694.59 ccw(c-271.05,1711.66) -271.05,1687.52 ; C105.1@-288.12,1694.59 ccw(c-271.05,1711.66) -271.05,1687.52 ; C105.1@-288.12,1694.59 ccw(c-271.05,1711.66) -271.05,1687.52 ; -264.33,-762.48 cw(c-264.33,-786.62) C66.1@-247.26,-769.55 ; -264.33,-762.48 ccw(c-264.33,-738.34) C66.1@-247.26,-755.41 ; -264.33,-762.48 cw(c-264.33,-786.62) C66.1@-247.26,-769.55 ; -264.33,-762.48 ccw(c-264.33,-738.34) C66.1@-247.26,-755.41 ; -264.33,-762.48 ccw(c-264.33,-738.34) C66.1@-247.26,-755.41 ; -264.33,-762.48 cw(c-264.33,-786.62) C66.1@-247.26,-769.55 ; -264.33,467.52 cw(c-264.33,443.38) C43.1@-247.26,460.45 ; -264.33,467.52 ccw(c-264.33,491.66) C43.1@-247.26,474.59 ; -264.33,467.52 cw(c-264.33,443.38) C43.1@-247.26,460.45 ; -264.33,467.52 ccw(c-264.33,491.66) C43.1@-247.26,474.59 ; -264.33,467.52 ccw(c-264.33,491.66) C43.1@-247.26,474.59 ; -264.33,467.52 cw(c-264.33,443.38) C43.1@-247.26,460.45 ; -259.33,1687.52 cw(c-259.33,1663.38) C106.1@-242.26,1680.45 ; -259.33,1687.52 ccw(c-259.33,1711.66) C106.1@-242.26,1694.59 ; -259.33,1687.52 cw(c-259.33,1663.38) C106.1@-242.26,1680.45 ; -259.33,1687.52 ccw(c-259.33,1711.66) C106.1@-242.26,1694.59 ; -259.33,1687.52 ccw(c-259.33,1711.66) C106.1@-242.26,1694.59 ; -259.33,1687.52 cw(c-259.33,1663.38) C106.1@-242.26,1680.45 ; C66.1@-247.26,-755.41 ccw(c-264.33,-738.34) -240.19,-738.34 ; C66.1@-247.26,-755.41 ccw(c-264.33,-738.34) -240.19,-738.34 ; C66.1@-247.26,-755.41 ccw(c-264.33,-738.34) -240.19,-738.34 ; C43.1@-247.26,474.59 ccw(c-264.33,491.66) -240.19,491.66 ; C43.1@-247.26,474.59 ccw(c-264.33,491.66) -240.19,491.66 ; C43.1@-247.26,474.59 ccw(c-264.33,491.66) -240.19,491.66 ; C106.1@-242.26,1694.59 ccw(c-259.33,1711.66) -235.19,1711.66 ; C106.1@-242.26,1694.59 ccw(c-259.33,1711.66) -235.19,1711.66 ; C106.1@-242.26,1694.59 ccw(c-259.33,1711.66) -235.19,1711.66 ; -240.19,-738.34 ccw(c-216.05,-738.34) C66.1@-233.12,-755.41 ; -240.19,-738.34 ccw(c-216.05,-738.34) C66.1@-233.12,-755.41 ; -240.19,-738.34 ccw(c-216.05,-738.34) C66.1@-233.12,-755.41 ; -240.19,491.66 ccw(c-216.05,491.66) C43.1@-233.12,474.59 ; -240.19,491.66 ccw(c-216.05,491.66) C43.1@-233.12,474.59 ; -240.19,491.66 ccw(c-216.05,491.66) C43.1@-233.12,474.59 ; -235.19,1711.66 ccw(c-211.05,1711.66) C106.1@-228.12,1694.59 ; -235.19,1711.66 ccw(c-211.05,1711.66) C106.1@-228.12,1694.59 ; -235.19,1711.66 ccw(c-211.05,1711.66) C106.1@-228.12,1694.59 ; C84.2@-113.19,-339.14 ccw(c-159.71,-287.48) v1(-90.19,-287.48) ; C84.2@-113.19,-339.14 ccw(c-159.71,-287.48) v1(-90.19,-287.48) ; C84.2@-113.19,-339.14 ccw(c-159.71,-287.48) v1(-90.19,-287.48) ; C68.1@-113.12,-824.55 cw(c-96.05,-841.62) -96.05,-817.48 ; C68.1@-113.12,-824.55 cw(c-96.05,-841.62) -96.05,-817.48 ; C68.1@-113.12,-824.55 cw(c-96.05,-841.62) -96.05,-817.48 ; C68.1@-113.12,-810.41 ccw(c-96.05,-793.34) -96.05,-817.48 ; C68.1@-113.12,-810.41 ccw(c-96.05,-793.34) -96.05,-817.48 ; C68.1@-113.12,-810.41 ccw(c-96.05,-793.34) -96.05,-817.48 ; C44.1@-113.12,405.45 cw(c-96.05,388.38) -96.05,412.52 ; C44.1@-113.12,405.45 cw(c-96.05,388.38) -96.05,412.52 ; C44.1@-113.12,405.45 cw(c-96.05,388.38) -96.05,412.52 ; C44.1@-113.12,419.59 ccw(c-96.05,436.66) -96.05,412.52 ; C44.1@-113.12,419.59 ccw(c-96.05,436.66) -96.05,412.52 ; C44.1@-113.12,419.59 ccw(c-96.05,436.66) -96.05,412.52 ; C108.1@-108.12,1625.45 cw(c-91.05,1608.38) -91.05,1632.52 ; C108.1@-108.12,1625.45 cw(c-91.05,1608.38) -91.05,1632.52 ; C108.1@-108.12,1625.45 cw(c-91.05,1608.38) -91.05,1632.52 ; C108.1@-108.12,1639.59 ccw(c-91.05,1656.66) -91.05,1632.52 ; C108.1@-108.12,1639.59 ccw(c-91.05,1656.66) -91.05,1632.52 ; C108.1@-108.12,1639.59 ccw(c-91.05,1656.66) -91.05,1632.52 ; C84.2@-106.5,-346.58 ccw(c-139.48,-309.95) -90.19,-309.95 ; C84.2@-106.5,-346.58 ccw(c-139.48,-309.95) -90.19,-309.95 ; C84.2@-106.5,-346.58 ccw(c-139.48,-309.95) -90.19,-309.95 ; v1@-94.95,-290.23 cw(c-106.46,-296.87) -93.63,-300.31 ; v1@-94.95,-290.23 cw(c-106.46,-296.87) -93.63,-300.31 ; v1@-94.95,-290.23 cw(c-106.46,-296.87) -93.63,-300.31 ; v1@-94.08,-291.37 cw(c-103.47,-300.76) -90.19,-300.76 ; v1@-94.08,-291.37 cw(c-103.47,-300.76) -90.19,-300.76 ; v1@-94.08,-291.37 cw(c-103.47,-300.76) -90.19,-300.76 ; -93.63,-300.3 cw(c-80.8,-303.74) v1@-87.44,-292.24 ; -93.63,-300.3 cw(c-80.8,-303.74) v1@-87.44,-292.24 ; -93.63,-300.3 cw(c-80.8,-303.74) v1@-87.44,-292.24 ; v1@-92.94,-292.24 cw(c-99.58,-303.74) -86.76,-300.3 ; v1@-92.94,-292.24 cw(c-99.58,-303.74) -86.76,-300.3 ; v1@-92.94,-292.24 cw(c-99.58,-303.74) -86.76,-300.3 ; -90.19,-309.95 ccw(c-40.9,-309.95) C84.2@-73.88,-346.58 ; -90.19,-309.95 ccw(c-40.9,-309.95) C84.2@-73.88,-346.58 ; -90.19,-309.95 ccw(c-40.9,-309.95) C84.2@-73.88,-346.58 ; -90.19,-300.76 cw(c-76.91,-300.76) v1@-86.3,-291.37 ; -90.19,-300.76 cw(c-76.91,-300.76) v1@-86.3,-291.37 ; -90.19,-300.76 cw(c-76.91,-300.76) v1@-86.3,-291.37 ; v1(-90.19,-287.48) ccw(c-20.67,-287.48) C84.2@-67.19,-339.14 ; v1(-90.19,-287.48) ccw(c-20.67,-287.48) C84.2@-67.19,-339.14 ; v1(-90.19,-287.48) ccw(c-20.67,-287.48) C84.2@-67.19,-339.14 ; -86.75,-300.31 cw(c-73.93,-296.87) v1@-85.43,-290.23 ; -86.75,-300.31 cw(c-73.93,-296.87) v1@-85.43,-290.23 ; -86.75,-300.31 cw(c-73.93,-296.87) v1@-85.43,-290.23 ; -84.33,-817.48 cw(c-84.33,-841.62) C69.1@-67.26,-824.55 ; -84.33,-817.48 ccw(c-84.33,-793.34) C69.1@-67.26,-810.41 ; -84.33,-817.48 cw(c-84.33,-841.62) C69.1@-67.26,-824.55 ; -84.33,-817.48 ccw(c-84.33,-793.34) C69.1@-67.26,-810.41 ; -84.33,-817.48 ccw(c-84.33,-793.34) C69.1@-67.26,-810.41 ; -84.33,-817.48 cw(c-84.33,-841.62) C69.1@-67.26,-824.55 ; -84.33,412.52 cw(c-84.33,388.38) C45.1@-67.26,405.45 ; -84.33,412.52 ccw(c-84.33,436.66) C45.1@-67.26,419.59 ; -84.33,412.52 cw(c-84.33,388.38) C45.1@-67.26,405.45 ; -84.33,412.52 ccw(c-84.33,436.66) C45.1@-67.26,419.59 ; -84.33,412.52 ccw(c-84.33,436.66) C45.1@-67.26,419.59 ; -84.33,412.52 cw(c-84.33,388.38) C45.1@-67.26,405.45 ; -79.33,1632.52 cw(c-79.33,1608.38) C107.1@-62.26,1625.45 ; -79.33,1632.52 ccw(c-79.33,1656.66) C107.1@-62.26,1639.59 ; -79.33,1632.52 cw(c-79.33,1608.38) C107.1@-62.26,1625.45 ; -79.33,1632.52 ccw(c-79.33,1656.66) C107.1@-62.26,1639.59 ; -79.33,1632.52 ccw(c-79.33,1656.66) C107.1@-62.26,1639.59 ; -79.33,1632.52 cw(c-79.33,1608.38) C107.1@-62.26,1625.45 ; C107.1@-55.19,1632.52 cw(c-45.34,1618.94) -33.48,1630.8 ccw(c-45.34,1618.94) C107.1@-55.19,1632.52 ; C107.1@-55.19,1632.52 cw(c-54.21,1586.64) -21.76,1619.09 ccw(c-54.21,1586.64) C107.1@-55.19,1632.52 ; C107.1@-55.19,1632.52 -35.19,1632.52 ; C69.1@-53.12,-824.55 cw(c-36.05,-841.62) -36.05,-817.48 ; C69.1@-53.12,-824.55 cw(c-36.05,-841.62) -36.05,-817.48 ; C69.1@-53.12,-824.55 cw(c-36.05,-841.62) -36.05,-817.48 ; C69.1@-53.12,-810.41 ccw(c-36.05,-793.34) -36.05,-817.48 ; C69.1@-53.12,-810.41 ccw(c-36.05,-793.34) -36.05,-817.48 ; C69.1@-53.12,-810.41 ccw(c-36.05,-793.34) -36.05,-817.48 ; C45.1@-53.12,405.45 cw(c-36.05,388.38) -36.05,412.52 ; C45.1@-53.12,405.45 cw(c-36.05,388.38) -36.05,412.52 ; C45.1@-53.12,405.45 cw(c-36.05,388.38) -36.05,412.52 ; C45.1@-53.12,419.59 ccw(c-36.05,436.66) -36.05,412.52 ; C45.1@-53.12,419.59 ccw(c-36.05,436.66) -36.05,412.52 ; C45.1@-53.12,419.59 ccw(c-36.05,436.66) -36.05,412.52 ; C107.1@-47.19,1626.52 cw(c-35.19,1617.52) -35.19,1632.52 ; C107.1@-47.19,1626.52 cw(c-35.19,1617.52) -35.19,1632.52 ; C107.1@-47.19,1626.52 cw(c-35.19,1617.52) -35.19,1632.52 ; C107.1@-47.19,1638.52 ccw(c-35.19,1647.52) -35.19,1632.52 ; C107.1@-47.19,1638.52 ccw(c-35.19,1647.52) -35.19,1632.52 ; C107.1@-47.19,1638.52 ccw(c-35.19,1647.52) -35.19,1632.52 ; -35.19,1632.52 -15.19,1612.52 ; -32.12,1626.86 ccw(c-37.65,1604.32) -49.91,1624.03 cw(c-37.65,1604.32) -32.12,1626.86 ; -32.12,1626.86 cw(c-26.59,1649.41) -46.58,1637.6 ccw(c-26.59,1649.41) -32.12,1626.86 ; -28.47,-817.48 cw(c-28.47,-830.76) v1@-19.08,-821.37 ; -28.47,-817.48 ccw(c-28.47,-804.2) v1@-19.08,-813.59 ; -28.47,-817.48 cw(c-28.47,-830.76) v1@-19.08,-821.37 ; -28.47,-817.48 ccw(c-28.47,-804.2) v1@-19.08,-813.59 ; -28.47,-817.48 ccw(c-28.47,-804.2) v1@-19.08,-813.59 ; -28.47,-817.48 cw(c-28.47,-830.76) v1@-19.08,-821.37 ; C96.1@312.74,-974.55 cw(c295.67,-991.62) 319.81,-991.62 ; C96.1@312.74,-974.55 cw(c295.67,-991.62) 319.81,-991.62 ; C96.1@312.74,-974.55 cw(c295.67,-991.62) 319.81,-991.62 ; 319.81,-991.62 cw(c343.95,-991.62) C96.1@326.88,-974.55 ; 319.81,-991.62 cw(c343.95,-991.62) C96.1@326.88,-974.55 ; 319.81,-991.62 cw(c343.95,-991.62) C96.1@326.88,-974.55 ; C96.1@326.88,-974.55 cw(c343.95,-991.62) 343.95,-967.48 ; C96.1@326.88,-974.55 cw(c343.95,-991.62) 343.95,-967.48 ; C96.1@326.88,-974.55 cw(c343.95,-991.62) 343.95,-967.48 ; C96.1@326.88,-960.41 ccw(c343.95,-943.34) 343.95,-967.48 ; C96.1@326.88,-960.41 ccw(c343.95,-943.34) 343.95,-967.48 ; C96.1@326.88,-960.41 ccw(c343.95,-943.34) 343.95,-967.48 ; 355.67,-967.48 cw(c355.67,-991.62) C95.1@372.74,-974.55 ; 355.67,-967.48 ccw(c355.67,-943.34) C95.1@372.74,-960.41 ; 355.67,-967.48 cw(c355.67,-991.62) C95.1@372.74,-974.55 ; 355.67,-967.48 ccw(c355.67,-943.34) C95.1@372.74,-960.41 ; 355.67,-967.48 ccw(c355.67,-943.34) C95.1@372.74,-960.41 ; 355.67,-967.48 cw(c355.67,-991.62) C95.1@372.74,-974.55 ; C97.1@411.88,-769.55 cw(c428.95,-786.62) 428.95,-762.48 ; C97.1@411.88,-769.55 cw(c428.95,-786.62) 428.95,-762.48 ; C97.1@411.88,-769.55 cw(c428.95,-786.62) 428.95,-762.48 ; C97.1@411.88,-755.41 ccw(c428.95,-738.34) 428.95,-762.48 ; C97.1@411.88,-755.41 ccw(c428.95,-738.34) 428.95,-762.48 ; C97.1@411.88,-755.41 ccw(c428.95,-738.34) 428.95,-762.48 ; 440.67,-762.48 cw(c440.67,-786.62) C98.1@457.74,-769.55 ; 440.67,-762.48 ccw(c440.67,-738.34) C98.1@457.74,-755.41 ; 440.67,-762.48 cw(c440.67,-786.62) C98.1@457.74,-769.55 ; 440.67,-762.48 ccw(c440.67,-738.34) C98.1@457.74,-755.41 ; 440.67,-762.48 ccw(c440.67,-738.34) C98.1@457.74,-755.41 ; 440.67,-762.48 cw(c440.67,-786.62) C98.1@457.74,-769.55 ; C98.1@457.74,-755.41 ccw(c440.67,-738.34) 464.81,-738.34 ; C98.1@457.74,-755.41 ccw(c440.67,-738.34) 464.81,-738.34 ; C98.1@457.74,-755.41 ccw(c440.67,-738.34) 464.81,-738.34 ; 464.81,-738.34 ccw(c488.95,-738.34) C98.1@471.88,-755.41 ; 464.81,-738.34 ccw(c488.95,-738.34) C98.1@471.88,-755.41 ; 464.81,-738.34 ccw(c488.95,-738.34) C98.1@471.88,-755.41 ; C116.2@591.81,-339.14 ccw(c545.29,-287.48) v1(614.81,-287.48) ; C116.2@591.81,-339.14 ccw(c545.29,-287.48) v1(614.81,-287.48) ; C116.2@591.81,-339.14 ccw(c545.29,-287.48) v1(614.81,-287.48) ; C99.1@591.88,-824.55 cw(c608.95,-841.62) 608.95,-817.48 ; C99.1@591.88,-824.55 cw(c608.95,-841.62) 608.95,-817.48 ; C99.1@591.88,-824.55 cw(c608.95,-841.62) 608.95,-817.48 ; C99.1@591.88,-810.41 ccw(c608.95,-793.34) 608.95,-817.48 ; C99.1@591.88,-810.41 ccw(c608.95,-793.34) 608.95,-817.48 ; C99.1@591.88,-810.41 ccw(c608.95,-793.34) 608.95,-817.48 ; C116.2@598.5,-346.58 ccw(c565.52,-309.95) 614.81,-309.95 ; C116.2@598.5,-346.58 ccw(c565.52,-309.95) 614.81,-309.95 ; C116.2@598.5,-346.58 ccw(c565.52,-309.95) 614.81,-309.95 ; v1@610.05,-290.23 cw(c598.54,-296.87) 611.37,-300.31 ; v1@610.05,-290.23 cw(c598.54,-296.87) 611.37,-300.31 ; v1@610.05,-290.23 cw(c598.54,-296.87) 611.37,-300.31 ; v1@610.92,-291.37 cw(c601.53,-300.76) 614.81,-300.76 ; v1@610.92,-291.37 cw(c601.53,-300.76) 614.81,-300.76 ; v1@610.92,-291.37 cw(c601.53,-300.76) 614.81,-300.76 ; 611.37,-300.3 cw(c624.2,-303.74) v1@617.56,-292.24 ; 611.37,-300.3 cw(c624.2,-303.74) v1@617.56,-292.24 ; 611.37,-300.3 cw(c624.2,-303.74) v1@617.56,-292.24 ; v1@612.06,-292.24 cw(c605.42,-303.74) 618.24,-300.3 ; v1@612.06,-292.24 cw(c605.42,-303.74) 618.24,-300.3 ; v1@612.06,-292.24 cw(c605.42,-303.74) 618.24,-300.3 ; 614.81,-309.95 ccw(c664.1,-309.95) C116.2@631.12,-346.58 ; 614.81,-309.95 ccw(c664.1,-309.95) C116.2@631.12,-346.58 ; 614.81,-309.95 ccw(c664.1,-309.95) C116.2@631.12,-346.58 ; 614.81,-300.76 cw(c628.09,-300.76) v1@618.7,-291.37 ; 614.81,-300.76 cw(c628.09,-300.76) v1@618.7,-291.37 ; 614.81,-300.76 cw(c628.09,-300.76) v1@618.7,-291.37 ; v1(614.81,-287.48) ccw(c684.33,-287.48) C116.2@637.81,-339.14 ; v1(614.81,-287.48) ccw(c684.33,-287.48) C116.2@637.81,-339.14 ; v1(614.81,-287.48) ccw(c684.33,-287.48) C116.2@637.81,-339.14 ; 618.25,-300.31 cw(c631.07,-296.87) v1@619.57,-290.23 ; 618.25,-300.31 cw(c631.07,-296.87) v1@619.57,-290.23 ; 618.25,-300.31 cw(c631.07,-296.87) v1@619.57,-290.23 ; 620.67,-817.48 cw(c620.67,-841.62) C100.1@637.74,-824.55 ; 620.67,-817.48 ccw(c620.67,-793.34) C100.1@637.74,-810.41 ; 620.67,-817.48 cw(c620.67,-841.62) C100.1@637.74,-824.55 ; 620.67,-817.48 ccw(c620.67,-793.34) C100.1@637.74,-810.41 ; 620.67,-817.48 ccw(c620.67,-793.34) C100.1@637.74,-810.41 ; 620.67,-817.48 cw(c620.67,-841.62) C100.1@637.74,-824.55 ; C100.1@651.88,-824.55 cw(c668.95,-841.62) 668.95,-817.48 ; C100.1@651.88,-824.55 cw(c668.95,-841.62) 668.95,-817.48 ; C100.1@651.88,-824.55 cw(c668.95,-841.62) 668.95,-817.48 ; C100.1@651.88,-810.41 ccw(c668.95,-793.34) 668.95,-817.48 ; C100.1@651.88,-810.41 ccw(c668.95,-793.34) 668.95,-817.48 ; C100.1@651.88,-810.41 ccw(c668.95,-793.34) 668.95,-817.48 ; v1@685.92,-863.59 ccw(c676.53,-854.2) 689.81,-854.2 ; v1@685.92,-863.59 ccw(c676.53,-854.2) 689.81,-854.2 ; v1@685.92,-863.59 ccw(c676.53,-854.2) 689.81,-854.2 ; 689.81,-854.2 ccw(c703.09,-854.2) v1@693.7,-863.59 ; 689.81,-854.2 ccw(c703.09,-854.2) v1@693.7,-863.59 ; 689.81,-854.2 ccw(c703.09,-854.2) v1@693.7,-863.59 ; C124.1@1007.74,-974.55 cw(c990.67,-991.62) 1014.81,-991.62 ; C124.1@1007.74,-974.55 cw(c990.67,-991.62) 1014.81,-991.62 ; C124.1@1007.74,-974.55 cw(c990.67,-991.62) 1014.81,-991.62 ; 1014.81,-991.62 cw(c1038.95,-991.62) C124.1@1021.88,-974.55 ; 1014.81,-991.62 cw(c1038.95,-991.62) C124.1@1021.88,-974.55 ; 1014.81,-991.62 cw(c1038.95,-991.62) C124.1@1021.88,-974.55 ; C124.1@1021.88,-974.55 cw(c1038.95,-991.62) 1038.95,-967.48 ; C124.1@1021.88,-974.55 cw(c1038.95,-991.62) 1038.95,-967.48 ; C124.1@1021.88,-974.55 cw(c1038.95,-991.62) 1038.95,-967.48 ; C124.1@1021.88,-960.41 ccw(c1038.95,-943.34) 1038.95,-967.48 ; C124.1@1021.88,-960.41 ccw(c1038.95,-943.34) 1038.95,-967.48 ; C124.1@1021.88,-960.41 ccw(c1038.95,-943.34) 1038.95,-967.48 ; 1050.67,-967.48 cw(c1050.67,-991.62) C125.1@1067.74,-974.55 ; 1050.67,-967.48 ccw(c1050.67,-943.34) C125.1@1067.74,-960.41 ; 1050.67,-967.48 cw(c1050.67,-991.62) C125.1@1067.74,-974.55 ; 1050.67,-967.48 ccw(c1050.67,-943.34) C125.1@1067.74,-960.41 ; 1050.67,-967.48 ccw(c1050.67,-943.34) C125.1@1067.74,-960.41 ; 1050.67,-967.48 cw(c1050.67,-991.62) C125.1@1067.74,-974.55 ; C126.1@1111.88,-769.55 cw(c1128.95,-786.62) 1128.95,-762.48 ; C126.1@1111.88,-769.55 cw(c1128.95,-786.62) 1128.95,-762.48 ; C126.1@1111.88,-769.55 cw(c1128.95,-786.62) 1128.95,-762.48 ; C126.1@1111.88,-755.41 ccw(c1128.95,-738.34) 1128.95,-762.48 ; C126.1@1111.88,-755.41 ccw(c1128.95,-738.34) 1128.95,-762.48 ; C126.1@1111.88,-755.41 ccw(c1128.95,-738.34) 1128.95,-762.48 ; 1140.67,-762.48 cw(c1140.67,-786.62) C127.1@1157.74,-769.55 ; 1140.67,-762.48 ccw(c1140.67,-738.34) C127.1@1157.74,-755.41 ; 1140.67,-762.48 cw(c1140.67,-786.62) C127.1@1157.74,-769.55 ; 1140.67,-762.48 ccw(c1140.67,-738.34) C127.1@1157.74,-755.41 ; 1140.67,-762.48 ccw(c1140.67,-738.34) C127.1@1157.74,-755.41 ; 1140.67,-762.48 cw(c1140.67,-786.62) C127.1@1157.74,-769.55 ; C127.1@1157.74,-755.41 ccw(c1140.67,-738.34) 1164.81,-738.34 ; C127.1@1157.74,-755.41 ccw(c1140.67,-738.34) 1164.81,-738.34 ; C127.1@1157.74,-755.41 ccw(c1140.67,-738.34) 1164.81,-738.34 ; 1164.81,-738.34 ccw(c1188.95,-738.34) C127.1@1171.88,-755.41 ; 1164.81,-738.34 ccw(c1188.95,-738.34) C127.1@1171.88,-755.41 ; 1164.81,-738.34 ccw(c1188.95,-738.34) C127.1@1171.88,-755.41 ; C133.2@1291.81,-339.14 ccw(c1245.29,-287.48) v1(1314.81,-287.48) ; C133.2@1291.81,-339.14 ccw(c1245.29,-287.48) v1(1314.81,-287.48) ; C133.2@1291.81,-339.14 ccw(c1245.29,-287.48) v1(1314.81,-287.48) ; C129.1@1291.88,-824.55 cw(c1308.95,-841.62) 1308.95,-817.48 ; C129.1@1291.88,-824.55 cw(c1308.95,-841.62) 1308.95,-817.48 ; C129.1@1291.88,-824.55 cw(c1308.95,-841.62) 1308.95,-817.48 ; C129.1@1291.88,-810.41 ccw(c1308.95,-793.34) 1308.95,-817.48 ; C129.1@1291.88,-810.41 ccw(c1308.95,-793.34) 1308.95,-817.48 ; C129.1@1291.88,-810.41 ccw(c1308.95,-793.34) 1308.95,-817.48 ; C133.2@1298.5,-346.58 ccw(c1265.52,-309.95) 1314.81,-309.95 ; C133.2@1298.5,-346.58 ccw(c1265.52,-309.95) 1314.81,-309.95 ; C133.2@1298.5,-346.58 ccw(c1265.52,-309.95) 1314.81,-309.95 ; v1@1310.05,-290.23 cw(c1298.54,-296.87) 1311.37,-300.31 ; v1@1310.05,-290.23 cw(c1298.54,-296.87) 1311.37,-300.31 ; v1@1310.05,-290.23 cw(c1298.54,-296.87) 1311.37,-300.31 ; v1@1310.92,-291.37 cw(c1301.53,-300.76) 1314.81,-300.76 ; v1@1310.92,-291.37 cw(c1301.53,-300.76) 1314.81,-300.76 ; v1@1310.92,-291.37 cw(c1301.53,-300.76) 1314.81,-300.76 ; 1311.37,-300.3 cw(c1324.2,-303.74) v1@1317.56,-292.24 ; 1311.37,-300.3 cw(c1324.2,-303.74) v1@1317.56,-292.24 ; 1311.37,-300.3 cw(c1324.2,-303.74) v1@1317.56,-292.24 ; v1@1312.06,-292.24 cw(c1305.42,-303.74) 1318.24,-300.3 ; v1@1312.06,-292.24 cw(c1305.42,-303.74) 1318.24,-300.3 ; v1@1312.06,-292.24 cw(c1305.42,-303.74) 1318.24,-300.3 ; 1314.81,-309.95 ccw(c1364.1,-309.95) C133.2@1331.12,-346.58 ; 1314.81,-309.95 ccw(c1364.1,-309.95) C133.2@1331.12,-346.58 ; 1314.81,-309.95 ccw(c1364.1,-309.95) C133.2@1331.12,-346.58 ; 1314.81,-300.76 cw(c1328.09,-300.76) v1@1318.7,-291.37 ; 1314.81,-300.76 cw(c1328.09,-300.76) v1@1318.7,-291.37 ; 1314.81,-300.76 cw(c1328.09,-300.76) v1@1318.7,-291.37 ; v1(1314.81,-287.48) ccw(c1384.33,-287.48) C133.2@1337.81,-339.14 ; v1(1314.81,-287.48) ccw(c1384.33,-287.48) C133.2@1337.81,-339.14 ; v1(1314.81,-287.48) ccw(c1384.33,-287.48) C133.2@1337.81,-339.14 ; 1318.25,-300.31 cw(c1331.07,-296.87) v1@1319.57,-290.23 ; 1318.25,-300.31 cw(c1331.07,-296.87) v1@1319.57,-290.23 ; 1318.25,-300.31 cw(c1331.07,-296.87) v1@1319.57,-290.23 ; 1320.67,-817.48 cw(c1320.67,-841.62) C128.1@1337.74,-824.55 ; 1320.67,-817.48 ccw(c1320.67,-793.34) C128.1@1337.74,-810.41 ; 1320.67,-817.48 cw(c1320.67,-841.62) C128.1@1337.74,-824.55 ; 1320.67,-817.48 ccw(c1320.67,-793.34) C128.1@1337.74,-810.41 ; 1320.67,-817.48 ccw(c1320.67,-793.34) C128.1@1337.74,-810.41 ; 1320.67,-817.48 cw(c1320.67,-841.62) C128.1@1337.74,-824.55 ; C128.1@1351.88,-824.55 cw(c1368.95,-841.62) 1368.95,-817.48 ; C128.1@1351.88,-824.55 cw(c1368.95,-841.62) 1368.95,-817.48 ; C128.1@1351.88,-824.55 cw(c1368.95,-841.62) 1368.95,-817.48 ; C128.1@1351.88,-810.41 ccw(c1368.95,-793.34) 1368.95,-817.48 ; C128.1@1351.88,-810.41 ccw(c1368.95,-793.34) 1368.95,-817.48 ; C128.1@1351.88,-810.41 ccw(c1368.95,-793.34) 1368.95,-817.48 ; C148.1@1442.74,-904.55 cw(c1425.67,-921.62) 1449.81,-921.62 ; C148.1@1442.74,-904.55 cw(c1425.67,-921.62) 1449.81,-921.62 ; C148.1@1442.74,-904.55 cw(c1425.67,-921.62) 1449.81,-921.62 ; 1449.81,-921.62 cw(c1473.95,-921.62) C148.1@1456.88,-904.55 ; 1449.81,-921.62 cw(c1473.95,-921.62) C148.1@1456.88,-904.55 ; 1449.81,-921.62 cw(c1473.95,-921.62) C148.1@1456.88,-904.55 ; C149.2@1758.14,-976.95 cw(c1721.16,-1022.48) v1(1779.81,-1022.48) ; C149.2@1758.14,-976.95 cw(c1721.16,-1022.48) v1(1779.81,-1022.48) ; C149.2@1758.14,-976.95 cw(c1721.16,-1022.48) v1(1779.81,-1022.48) ; C149.2@1764.44,-969.19 cw(c1738.22,-1001.47) 1779.81,-1001.47